# EAGLE board Photon_I2C_Shield_Panel (EAGLE 7.7.0)
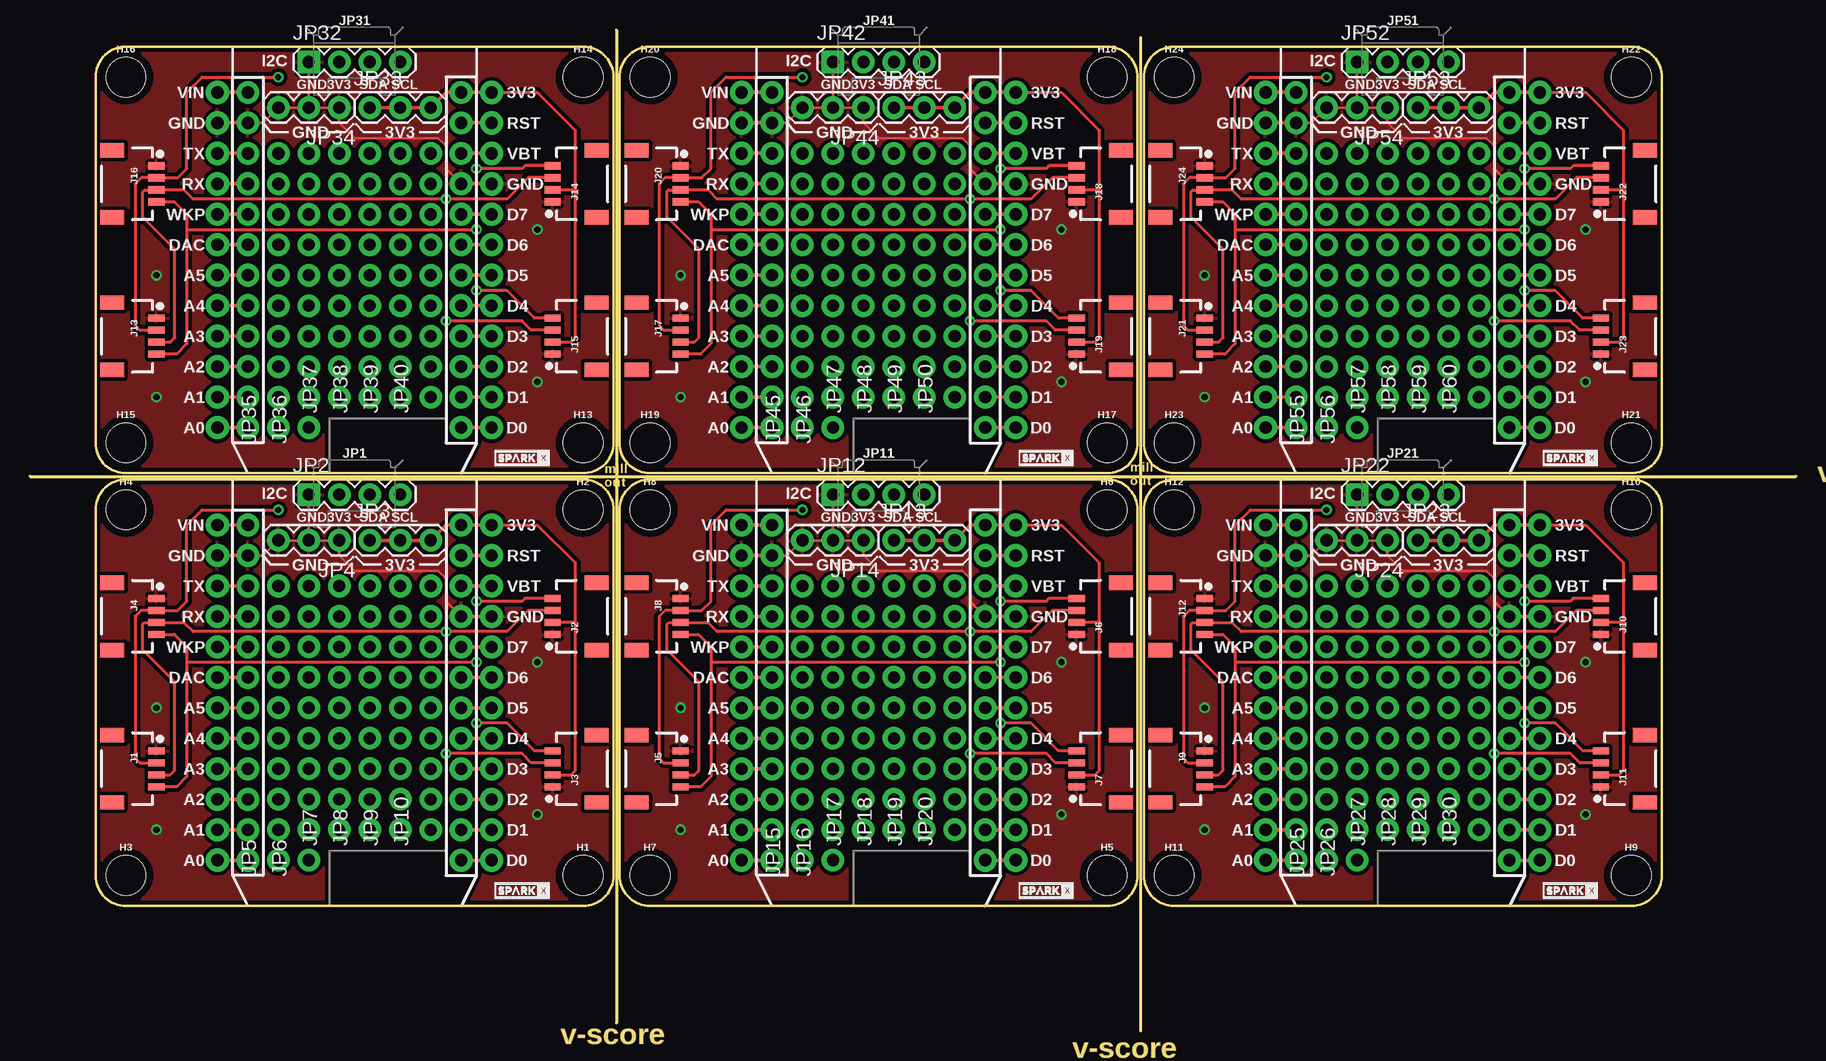
[diagram p0: board, top side]
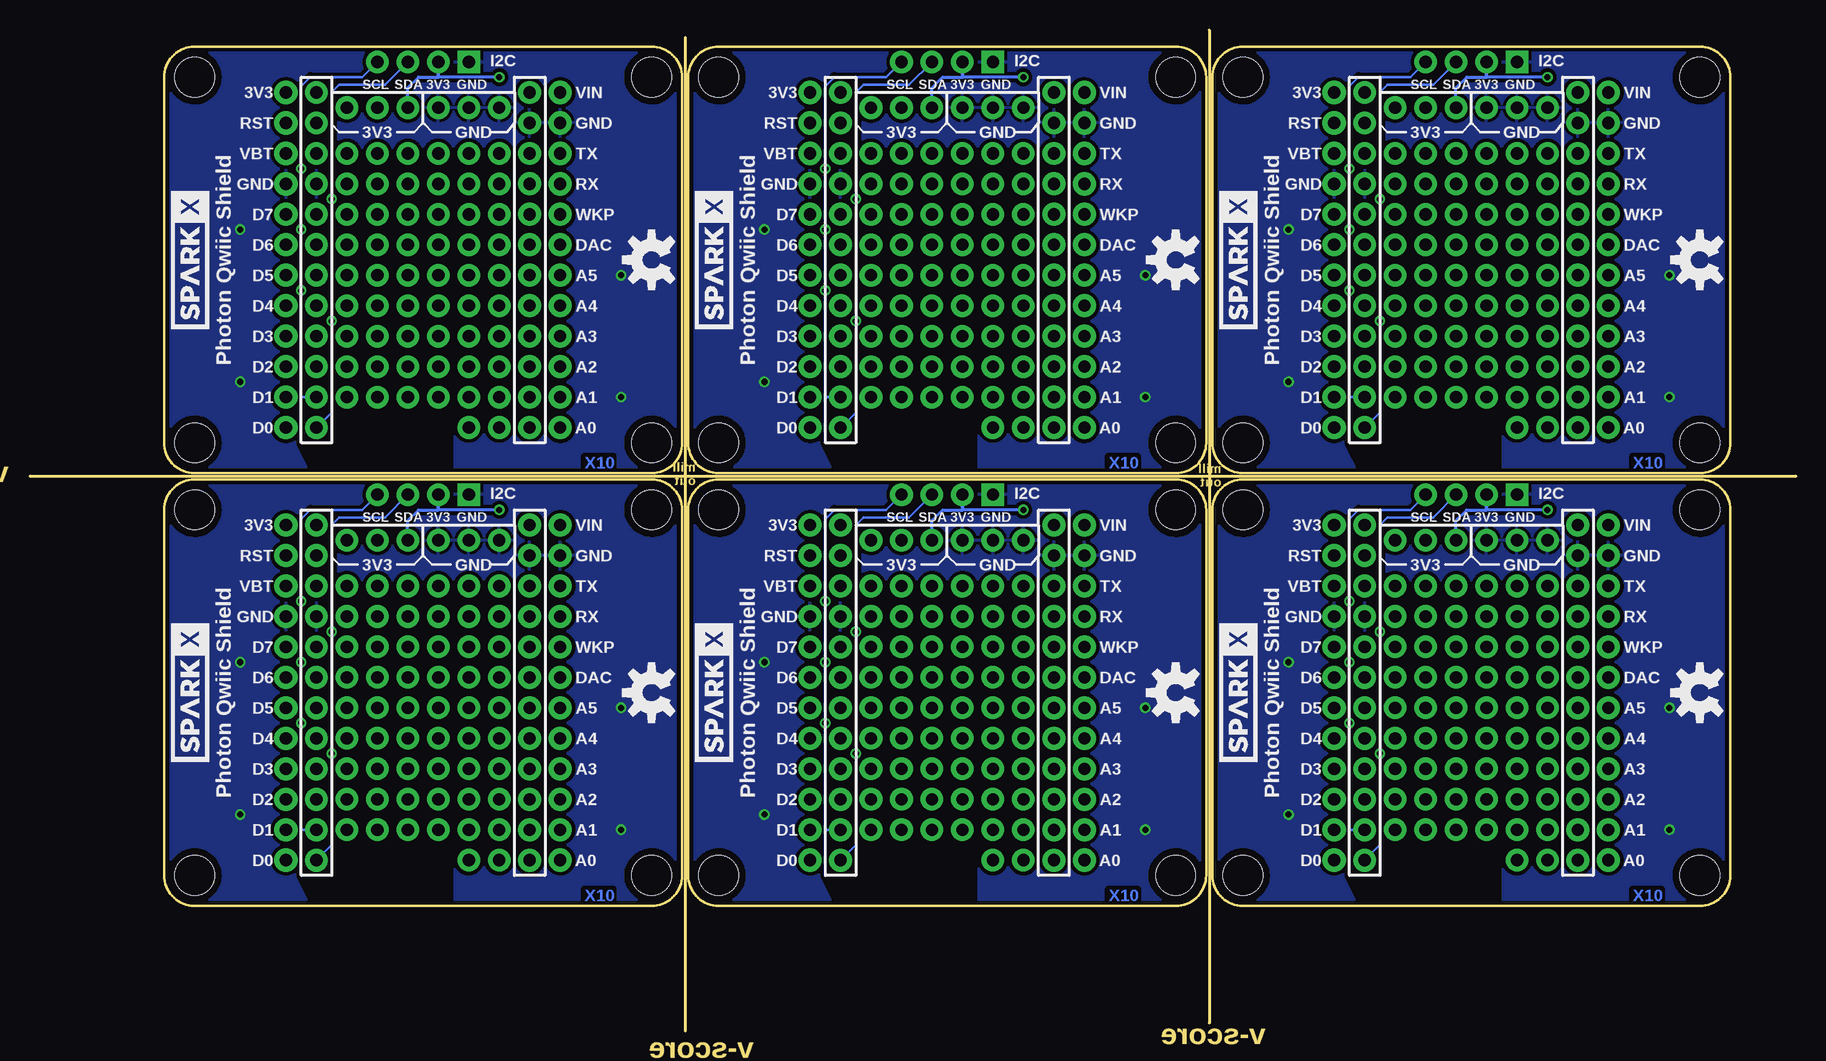
[diagram p1: board, bottom side, seen from below]

Size 147.19 x 83.44 mm. Coordinates in mm from the lower left corner, seen from the top.
Outline: 0,46.23 147.19,46.23
Outline: 48.89,83.44 48.89,0.63
Outline: 92.58,82.8 92.58,0
Outline: 5.46,12.95 5.46,43.43 arc-90 8,45.97 46.1,45.97 arc-90 48.64,43.43 48.64,12.95 arc-90 46.1,10.41 8,10.41 arc-90 5.46,12.95
Outline: 49.15,12.95 49.15,43.43 arc-90 51.69,45.97 89.79,45.97 arc-90 92.33,43.43 92.33,12.95 arc-90 89.79,10.41 51.69,10.41 arc-90 49.15,12.95
Outline: 92.84,12.95 92.84,43.43 arc-90 95.38,45.97 133.48,45.97 arc-90 136.02,43.43 136.02,12.95 arc-90 133.48,10.41 95.38,10.41 arc-90 92.84,12.95
Outline: 5.46,49.02 5.46,79.5 arc-90 8,82.04 46.1,82.04 arc-90 48.64,79.5 48.64,49.02 arc-90 46.1,46.48 8,46.48 arc-90 5.46,49.02
Outline: 49.15,49.02 49.15,79.5 arc-90 51.69,82.04 89.79,82.04 arc-90 92.33,79.5 92.33,49.02 arc-90 89.79,46.48 51.69,46.48 arc-90 49.15,49.02
Outline: 92.84,49.02 92.84,79.5 arc-90 95.38,82.04 133.48,82.04 arc-90 136.02,79.5 136.02,49.02 arc-90 133.48,46.48 95.38,46.48 arc-90 92.84,49.02
Copper layers (1*16): Top 0.035mm / dielectric 1.5mm / Bottom 0.035mm
Design rules "SparkFun-2-layer-TIGHT": minimum track width 7mil, minimum drill 15mil, track to track 7mil, track to pad 7mil, pad to pad 7mil, via to via 7mil, smd to smd 7mil, copper to edge 7mil, drill to drill 7mil, minimum pad ring 7mil, minimum via ring 7mil, stop-mask expansion 4mil, vias tented up to drill 25mil, thermal gap 10mil

## Footprints (pad centres in the part's own frame; a part is rotated, then mirrored left to right if it is on the bottom)
STAND-OFF = hole 3.302: 0,0
1X04_1MM_RA = smd 0.6 x 1.35: 1 -1.5,0; 2 -0.5,0; 3 0.5,0; 4 1.5,0 | smd 1.2 x 2: NC1 2.8,-3.675; NC2 -2.8,-3.675
PARTICLE_PHOTON_TEMPLATE_NO_STANDOFF = drill 1.016 pad 1.905: 1 -8.89,12.7; 2 -8.89,10.16; 3 -8.89,7.62; 4 -8.89,5.08; 5 -8.89,2.54; 6 -8.89,0; 7 -8.89,-2.54; 8 -8.89,-5.08; 9 -8.89,-7.62; 10 -8.89,-10.16; 11 -8.89,-12.7; 12 -8.89,-15.24; 13 8.89,-15.24; 14 8.89,-12.7; 15 8.89,-10.16; 16 8.89,-7.62; 17 8.89,-5.08; 18 8.89,-2.54; 19 8.89,0; 20 8.89,2.54; 21 8.89,5.08; 22 8.89,7.62; 23 8.89,10.16; 24 8.89,12.7 | drill 1.016 pad 1.93: 3V3 11.43,12.7; A0 -11.43,-15.24; A1 -11.43,-12.7; A2 -11.43,-10.16; A3 -11.43,-7.62; A4 -11.43,-5.08; A5 -11.43,-2.54; D0 11.43,-15.24; D1 11.43,-12.7; D2 11.43,-10.16; D3 11.43,-7.62; D4 11.43,-5.08; D5 11.43,-2.54; D6 11.43,0; D7 11.43,2.54; DAC -11.43,0; GND@0 -11.43,10.16; GND@2 11.43,5.08; RST 11.43,10.16; RX -11.43,5.08; TX -11.43,7.62; VBAT 11.43,7.62; VIN -11.43,12.7; WKP -11.43,2.54
1X04 = drill 1.016 pad 1.88 square: 1 0,0 | drill 1.016 pad 1.88: 2 2.54,0; 3 5.08,0; 4 7.62,0
1X03 = drill 1.016 pad 1.88: 1 0,0; 2 2.54,0; 3 5.08,0
1X10_NO_SILK = drill 1.016 pad 1.88: 1 0,0; 2 2.54,0; 3 5.08,0; 4 7.62,0; 5 10.16,0; 6 12.7,0; 7 15.24,0; 8 17.78,0; 9 20.32,0; 10 22.86,0
1X09_NO_SILK = drill 1.016 pad 1.88: 1 0,0; 2 2.54,0; 3 5.08,0; 4 7.62,0; 5 10.16,0; 6 12.7,0; 7 15.24,0; 8 17.78,0; 9 20.32,0

## Placement (x,y rotation side)
H1  STAND-OFF  [STAND-OFF]  46.1,12.95 0 top
H2  STAND-OFF  [STAND-OFF]  46.1,43.43 0 top
H3  STAND-OFF  [STAND-OFF]  8,12.95 0 top
H4  STAND-OFF  [STAND-OFF]  8,43.43 0 top
H5  STAND-OFF  [STAND-OFF]  89.79,12.95 0 top
H6  STAND-OFF  [STAND-OFF]  89.79,43.43 0 top
H7  STAND-OFF  [STAND-OFF]  51.69,12.95 0 top
H8  STAND-OFF  [STAND-OFF]  51.69,43.43 0 top
H9  STAND-OFF  [STAND-OFF]  133.48,12.95 0 top
H10  STAND-OFF  [STAND-OFF]  133.48,43.43 0 top
H11  STAND-OFF  [STAND-OFF]  95.38,12.95 0 top
H12  STAND-OFF  [STAND-OFF]  95.38,43.43 0 top
H13  STAND-OFF  [STAND-OFF]  46.1,49.02 0 top
H14  STAND-OFF  [STAND-OFF]  46.1,79.5 0 top
H15  STAND-OFF  [STAND-OFF]  8,49.02 0 top
H16  STAND-OFF  [STAND-OFF]  8,79.5 0 top
H17  STAND-OFF  [STAND-OFF]  89.79,49.02 0 top
H18  STAND-OFF  [STAND-OFF]  89.79,79.5 0 top
H19  STAND-OFF  [STAND-OFF]  51.69,49.02 0 top
H20  STAND-OFF  [STAND-OFF]  51.69,79.5 0 top
H21  STAND-OFF  [STAND-OFF]  133.48,49.02 0 top
H22  STAND-OFF  [STAND-OFF]  133.48,79.5 0 top
H23  STAND-OFF  [STAND-OFF]  95.38,49.02 0 top
H24  STAND-OFF  [STAND-OFF]  95.38,79.5 0 top
J1  [1X04_1MM_RA]  10.54,21.84 270 top
J2  [1X04_1MM_RA]  43.56,34.54 90 top
J3  [1X04_1MM_RA]  43.56,21.84 90 top
J4  [1X04_1MM_RA]  10.54,34.54 270 top
J5  [1X04_1MM_RA]  54.23,21.84 270 top
J6  [1X04_1MM_RA]  87.25,34.54 90 top
J7  [1X04_1MM_RA]  87.25,21.84 90 top
J8  [1X04_1MM_RA]  54.23,34.54 270 top
J9  [1X04_1MM_RA]  97.92,21.84 270 top
J10  [1X04_1MM_RA]  130.94,34.54 90 top
J11  [1X04_1MM_RA]  130.94,21.84 90 top
J12  [1X04_1MM_RA]  97.92,34.54 270 top
J13  [1X04_1MM_RA]  10.54,57.91 270 top
J14  [1X04_1MM_RA]  43.56,70.61 90 top
J15  [1X04_1MM_RA]  43.56,57.91 90 top
J16  [1X04_1MM_RA]  10.54,70.61 270 top
J17  [1X04_1MM_RA]  54.23,57.91 270 top
J18  [1X04_1MM_RA]  87.25,70.61 90 top
J19  [1X04_1MM_RA]  87.25,57.91 90 top
J20  [1X04_1MM_RA]  54.23,70.61 270 top
J21  [1X04_1MM_RA]  97.92,57.91 270 top
J22  [1X04_1MM_RA]  130.94,70.61 90 top
J23  [1X04_1MM_RA]  130.94,57.91 90 top
J24  [1X04_1MM_RA]  97.92,70.61 270 top
JP1  PARTICLE_PHOTONTEMPLATE_NO_STANDOFF  [PARTICLE_PHOTON_TEMPLATE_NO_STANDOFF]  27.05,29.46 0 top
JP2  [1X04]  23.24,44.7 0 top
JP3  [1X03]  28.32,40.89 0 top
JP4  [1X03]  25.78,40.89 180 top
JP5  [1X10_NO_SILK]  20.7,14.22 90 top
JP6  [1X10_NO_SILK]  23.24,14.22 90 top
JP7  [1X09_NO_SILK]  25.78,16.76 90 top
JP8  [1X09_NO_SILK]  28.32,16.76 90 top
JP9  [1X09_NO_SILK]  30.86,16.76 90 top
JP10  [1X09_NO_SILK]  33.4,16.76 90 top
JP11  PARTICLE_PHOTONTEMPLATE_NO_STANDOFF  [PARTICLE_PHOTON_TEMPLATE_NO_STANDOFF]  70.74,29.46 0 top
JP12  [1X04]  66.93,44.7 0 top
JP13  [1X03]  72.01,40.89 0 top
JP14  [1X03]  69.47,40.89 180 top
JP15  [1X10_NO_SILK]  64.39,14.22 90 top
JP16  [1X10_NO_SILK]  66.93,14.22 90 top
JP17  [1X09_NO_SILK]  69.47,16.76 90 top
JP18  [1X09_NO_SILK]  72.01,16.76 90 top
JP19  [1X09_NO_SILK]  74.55,16.76 90 top
JP20  [1X09_NO_SILK]  77.09,16.76 90 top
JP21  PARTICLE_PHOTONTEMPLATE_NO_STANDOFF  [PARTICLE_PHOTON_TEMPLATE_NO_STANDOFF]  114.43,29.46 0 top
JP22  [1X04]  110.62,44.7 0 top
JP23  [1X03]  115.7,40.89 0 top
JP24  [1X03]  113.16,40.89 180 top
JP25  [1X10_NO_SILK]  108.08,14.22 90 top
JP26  [1X10_NO_SILK]  110.62,14.22 90 top
JP27  [1X09_NO_SILK]  113.16,16.76 90 top
JP28  [1X09_NO_SILK]  115.7,16.76 90 top
JP29  [1X09_NO_SILK]  118.24,16.76 90 top
JP30  [1X09_NO_SILK]  120.78,16.76 90 top
JP31  PARTICLE_PHOTONTEMPLATE_NO_STANDOFF  [PARTICLE_PHOTON_TEMPLATE_NO_STANDOFF]  27.05,65.53 0 top
JP32  [1X04]  23.24,80.77 0 top
JP33  [1X03]  28.32,76.96 0 top
JP34  [1X03]  25.78,76.96 180 top
JP35  [1X10_NO_SILK]  20.7,50.29 90 top
JP36  [1X10_NO_SILK]  23.24,50.29 90 top
JP37  [1X09_NO_SILK]  25.78,52.83 90 top
JP38  [1X09_NO_SILK]  28.32,52.83 90 top
JP39  [1X09_NO_SILK]  30.86,52.83 90 top
JP40  [1X09_NO_SILK]  33.4,52.83 90 top
JP41  PARTICLE_PHOTONTEMPLATE_NO_STANDOFF  [PARTICLE_PHOTON_TEMPLATE_NO_STANDOFF]  70.74,65.53 0 top
JP42  [1X04]  66.93,80.77 0 top
JP43  [1X03]  72.01,76.96 0 top
JP44  [1X03]  69.47,76.96 180 top
JP45  [1X10_NO_SILK]  64.39,50.29 90 top
JP46  [1X10_NO_SILK]  66.93,50.29 90 top
JP47  [1X09_NO_SILK]  69.47,52.83 90 top
JP48  [1X09_NO_SILK]  72.01,52.83 90 top
JP49  [1X09_NO_SILK]  74.55,52.83 90 top
JP50  [1X09_NO_SILK]  77.09,52.83 90 top
JP51  PARTICLE_PHOTONTEMPLATE_NO_STANDOFF  [PARTICLE_PHOTON_TEMPLATE_NO_STANDOFF]  114.43,65.53 0 top
JP52  [1X04]  110.62,80.77 0 top
JP53  [1X03]  115.7,76.96 0 top
JP54  [1X03]  113.16,76.96 180 top
JP55  [1X10_NO_SILK]  108.08,50.29 90 top
JP56  [1X10_NO_SILK]  110.62,50.29 90 top
JP57  [1X09_NO_SILK]  113.16,52.83 90 top
JP58  [1X09_NO_SILK]  115.7,52.83 90 top
JP59  [1X09_NO_SILK]  118.24,52.83 90 top
JP60  [1X09_NO_SILK]  120.78,52.83 90 top
LOGO1  OSHW-LOGOM  [OSHW-LOGO-M]  8,28.19 90 bottom
LOGO2  OSHW-LOGOM  [OSHW-LOGO-M]  51.69,28.19 90 bottom
LOGO3  OSHW-LOGOM  [OSHW-LOGO-M]  95.38,28.19 90 bottom
LOGO4  OSHW-LOGOM  [OSHW-LOGO-M]  8,64.26 90 bottom
LOGO5  OSHW-LOGOM  [OSHW-LOGO-M]  51.69,64.26 90 bottom
LOGO6  OSHW-LOGOM  [OSHW-LOGO-M]  95.38,64.26 90 bottom
U$1  [SPARKX-TINY]  41.02,11.68 0 top
U$2  [SPARKX-TINY]  84.71,11.68 0 top
U$3  SPARKX-LOGO5  [SPARKX-LARGE]  90.17,28.19 90 bottom
U$4  SPARKX-LOGO5  [SPARKX-LARGE]  46.48,28.19 90 bottom
U$5  [SPARKX-TINY]  128.4,11.68 0 top
U$6  SPARKX-LOGO5  [SPARKX-LARGE]  133.86,28.19 90 bottom
U$7  [SPARKX-TINY]  41.02,47.75 0 top
U$8  SPARKX-LOGO5  [SPARKX-LARGE]  46.48,64.26 90 bottom
U$9  [SPARKX-TINY]  84.71,47.75 0 top
U$10  SPARKX-LOGO5  [SPARKX-LARGE]  90.17,64.26 90 bottom
U$11  [SPARKX-TINY]  128.4,47.75 0 top
U$12  SPARKX-LOGO5  [SPARKX-LARGE]  133.86,64.26 90 bottom

## Library data of the parts
H1-H24 = SparkFun-Hardware
J1-J24 U$1-U$12 = SparkX
JP1 JP11 JP21 JP31 JP41 JP51 = SparkFun-Boards
JP2-JP4 JP7-JP10 JP12-JP14 JP17-JP20 JP22-JP24 JP27-JP30 JP32-JP34 JP37-JP40 JP42-JP44 JP47-JP50 JP52-JP54 JP57-JP60 = SparkFun-Connectors
JP5 JP6 JP15 JP16 JP25 JP26 JP35 JP36 JP45 JP46 JP55 JP56 = SparkFun-Connectors; PROD_ID: CONN-11563
LOGO1-LOGO6 = SparkFun-Aesthetics

## Nets
A0: JP1.12 JP1.A0
A1: JP1.11 JP1.A1
A2: JP1.10 JP1.A2
A3: JP1.9 JP1.A3
A4: JP1.8 JP1.A4
A5: JP1.7 JP1.A5
A6: JP11.7 JP11.A5
A7: JP11.8 JP11.A4
A8: JP11.9 JP11.A3
A9: JP11.10 JP11.A2
A10: JP11.11 JP11.A1
A11: JP11.12 JP11.A0
A12: JP21.7 JP21.A5
A13: JP21.8 JP21.A4
A14: JP21.9 JP21.A3
A15: JP21.10 JP21.A2
A16: JP21.11 JP21.A1
A17: JP21.12 JP21.A0
A18: JP31.7 JP31.A5
A19: JP31.8 JP31.A4
A20: JP31.9 JP31.A3
A21: JP31.10 JP31.A2
A22: JP31.11 JP31.A1
A23: JP31.12 JP31.A0
A24: JP41.7 JP41.A5
A25: JP41.8 JP41.A4
A26: JP41.9 JP41.A3
A27: JP41.10 JP41.A2
A28: JP41.11 JP41.A1
A29: JP41.12 JP41.A0
A30: JP51.7 JP51.A5
A31: JP51.8 JP51.A4
A32: JP51.9 JP51.A3
A33: JP51.10 JP51.A2
A34: JP51.11 JP51.A1
A35: JP51.12 JP51.A0
D1: JP11.20 JP11.D7
D2: JP1.15 JP1.D2
D3: JP1.16 JP1.D3
D4: JP1.17 JP1.D4
D5: JP1.18 JP1.D5
D6: JP1.19 JP1.D6
D7: JP1.20 JP1.D7
D8: JP11.19 JP11.D6
D9: JP11.18 JP11.D5
D10: JP11.17 JP11.D4
D11: JP11.16 JP11.D3
D12: JP11.15 JP11.D2
D13: JP21.20 JP21.D7
D14: JP21.19 JP21.D6
D15: JP21.18 JP21.D5
D16: JP21.17 JP21.D4
D17: JP21.16 JP21.D3
D18: JP21.15 JP21.D2
D19: JP31.20 JP31.D7
D20: JP31.19 JP31.D6
D21: JP31.18 JP31.D5
D22: JP31.17 JP31.D4
D23: JP31.16 JP31.D3
D24: JP31.15 JP31.D2
D25: JP41.20 JP41.D7
D26: JP41.19 JP41.D6
D27: JP41.18 JP41.D5
D28: JP41.17 JP41.D4
D29: JP41.16 JP41.D3
D30: JP41.15 JP41.D2
D31: JP51.20 JP51.D7
D32: JP51.19 JP51.D6
D33: JP51.18 JP51.D5
D34: JP51.17 JP51.D4
D35: JP51.16 JP51.D3
D36: JP51.15 JP51.D2
DAC: JP1.6 JP1.DAC
DAC1: JP11.6 JP11.DAC
DAC2: JP21.6 JP21.DAC
DAC3: JP31.6 JP31.DAC
DAC4: JP41.6 JP41.DAC
DAC5: JP51.6 JP51.DAC
GND: J1.1 J2.1 J3.1 J4.1 JP1.2 JP1.21 JP1.GND@0 JP1.GND@2 JP2.1 JP4.1 JP4.2 JP4.3
GND1: J5.1 J6.1 J7.1 J8.1 JP11.2 JP11.21 JP11.GND@0 JP11.GND@2 JP12.1 JP14.1 JP14.2 JP14.3
GND2: J9.1 J10.1 J11.1 J12.1 JP21.2 JP21.21 JP21.GND@0 JP21.GND@2 JP22.1 JP24.1 JP24.2 JP24.3
GND3: J13.1 J14.1 J15.1 J16.1 JP31.2 JP31.21 JP31.GND@0 JP31.GND@2 JP32.1 JP34.1 JP34.2 JP34.3
GND4: J17.1 J18.1 J19.1 J20.1 JP41.2 JP41.21 JP41.GND@0 JP41.GND@2 JP42.1 JP44.1 JP44.2 JP44.3
GND5: J21.1 J22.1 J23.1 J24.1 JP51.2 JP51.21 JP51.GND@0 JP51.GND@2 JP52.1 JP54.1 JP54.2 JP54.3
RST: JP1.23 JP1.RST
RST1: JP11.23 JP11.RST
RST2: JP21.23 JP21.RST
RST3: JP31.23 JP31.RST
RST4: JP41.23 JP41.RST
RST5: JP51.23 JP51.RST
RX: JP1.4 JP1.RX
RX1: JP11.4 JP11.RX
RX2: JP21.4 JP21.RX
RX3: JP31.4 JP31.RX
RX4: JP41.4 JP41.RX
RX5: JP51.4 JP51.RX
SCL: J1.4 J2.4 J3.4 J4.4 JP1.14 JP1.D1 JP2.4
SCL1: J5.4 J6.4 J7.4 J8.4 JP11.14 JP11.D1 JP12.4
SCL2: J9.4 J10.4 J11.4 J12.4 JP21.14 JP21.D1 JP22.4
SCL3: J13.4 J14.4 J15.4 J16.4 JP31.14 JP31.D1 JP32.4
SCL4: J17.4 J18.4 J19.4 J20.4 JP41.14 JP41.D1 JP42.4
SCL5: J21.4 J22.4 J23.4 J24.4 JP51.14 JP51.D1 JP52.4
SDA: J1.3 J2.3 J3.3 J4.3 JP1.13 JP1.D0 JP2.3
SDA1: J5.3 J6.3 J7.3 J8.3 JP11.13 JP11.D0 JP12.3
SDA2: J9.3 J10.3 J11.3 J12.3 JP21.13 JP21.D0 JP22.3
SDA3: J13.3 J14.3 J15.3 J16.3 JP31.13 JP31.D0 JP32.3
SDA4: J17.3 J18.3 J19.3 J20.3 JP41.13 JP41.D0 JP42.3
SDA5: J21.3 J22.3 J23.3 J24.3 JP51.13 JP51.D0 JP52.3
TX: JP1.3 JP1.TX
TX1: JP11.3 JP11.TX
TX2: JP21.3 JP21.TX
TX3: JP31.3 JP31.TX
TX4: JP41.3 JP41.TX
TX5: JP51.3 JP51.TX
VBAT: JP1.22 JP1.VBAT
VBAT1: JP11.22 JP11.VBAT
VBAT2: JP21.22 JP21.VBAT
VBAT3: JP31.22 JP31.VBAT
VBAT4: JP41.22 JP41.VBAT
VBAT5: JP51.22 JP51.VBAT
VCC: J1.2 J2.2 J3.2 J4.2 JP1.3V3 JP1.24 JP2.2 JP3.1 JP3.2 JP3.3
VCC1: J5.2 J6.2 J7.2 J8.2 JP11.3V3 JP11.24 JP12.2 JP13.1 JP13.2 JP13.3
VCC2: J9.2 J10.2 J11.2 J12.2 JP21.3V3 JP21.24 JP22.2 JP23.1 JP23.2 JP23.3
VCC3: J13.2 J14.2 J15.2 J16.2 JP31.3V3 JP31.24 JP32.2 JP33.1 JP33.2 JP33.3
VCC4: J17.2 J18.2 J19.2 J20.2 JP41.3V3 JP41.24 JP42.2 JP43.1 JP43.2 JP43.3
VCC5: J21.2 J22.2 J23.2 J24.2 JP51.3V3 JP51.24 JP52.2 JP53.1 JP53.2 JP53.3
VIN: JP1.1 JP1.VIN
VIN1: JP11.1 JP11.VIN
VIN2: JP21.1 JP21.VIN
VIN3: JP31.1 JP31.VIN
VIN4: JP41.1 JP41.VIN
VIN5: JP51.1 JP51.VIN
WKP: JP1.5 JP1.WKP
WKP1: JP11.5 JP11.WKP
WKP2: JP21.5 JP21.WKP
WKP3: JP31.5 JP31.WKP
WKP4: JP41.5 JP41.WKP
WKP5: JP51.5 JP51.WKP

## Tracks (layer width: path | path; a pad name or v marks a point on that pad's centre or on a via)
GND  (via drill 0.51)
  Top 0.203: JP1.2 19.43,39.62 JP4.3 JP4.2 | JP4.2 JP4.1 25.78,39.62 27.05,38.35 34.04,38.35 34.67,37.72 34.67,35.81 | JP4.2 JP2.1
  Top 0.254: 34.67,35.81 JP1.21
  other vias: 42.29,30.73 42.29,18.03 10.54,26.92 10.54,16.76
  pour Top (isolate 0.305): 5.46,45.97 5.46,10.41 48.64,10.41 48.64,45.97
  pour Bottom (isolate 0.305): 5.46,45.97 5.46,10.41 48.64,10.41 48.64,45.97
GND1  (via drill 0.51)
  Top 0.203: JP11.2 63.12,39.62 JP14.3 JP14.2 | JP14.2 JP14.1 69.47,39.62 70.74,38.35 77.72,38.35 78.36,37.72 78.36,35.81 | JP14.2 JP12.1
  Top 0.254: 78.36,35.81 JP11.21
  other vias: 85.98,30.73 85.98,18.03 54.23,26.92 54.23,16.76
  pour Top (isolate 0.305): 49.15,45.97 49.15,10.41 92.33,10.41 92.33,45.97
  pour Bottom (isolate 0.305): 49.15,45.97 49.15,10.41 92.33,10.41 92.33,45.97
GND2  (via drill 0.51)
  Top 0.203: JP21.2 106.81,39.62 JP24.3 JP24.2 | JP24.2 JP24.1 113.16,39.62 114.43,38.35 121.41,38.35 122.05,37.72 122.05,35.81 | JP24.2 JP22.1
  Top 0.254: 122.05,35.81 JP21.21
  other vias: 129.67,30.73 129.67,18.03 97.92,26.92 97.92,16.76
  pour Top (isolate 0.305): 92.84,45.97 92.84,10.41 136.02,10.41 136.02,45.97
  pour Bottom (isolate 0.305): 92.84,45.97 92.84,10.41 136.02,10.41 136.02,45.97
GND3  (via drill 0.51)
  Top 0.203: JP31.2 19.43,75.69 JP34.3 JP34.2 | JP34.2 JP34.1 25.78,75.69 27.05,74.42 34.04,74.42 34.67,73.79 34.67,71.88 | JP34.2 JP32.1
  Top 0.254: 34.67,71.88 JP31.21
  other vias: 42.29,66.8 42.29,54.1 10.54,62.99 10.54,52.83
  pour Top (isolate 0.305): 5.46,82.04 5.46,46.48 48.64,46.48 48.64,82.04
  pour Bottom (isolate 0.305): 5.46,82.04 5.46,46.48 48.64,46.48 48.64,82.04
GND4  (via drill 0.51)
  Top 0.203: JP41.2 63.12,75.69 JP44.3 JP44.2 | JP44.2 JP44.1 69.47,75.69 70.74,74.42 77.72,74.42 78.36,73.79 78.36,71.88 | JP44.2 JP42.1
  Top 0.254: 78.36,71.88 JP41.21
  other vias: 85.98,66.8 85.98,54.1 54.23,62.99 54.23,52.83
  pour Top (isolate 0.305): 49.15,82.04 49.15,46.48 92.33,46.48 92.33,82.04
  pour Bottom (isolate 0.305): 49.15,82.04 49.15,46.48 92.33,46.48 92.33,82.04
GND5  (via drill 0.51)
  Top 0.203: JP51.2 106.81,75.69 JP54.3 JP54.2 | JP54.2 JP54.1 113.16,75.69 114.43,74.42 121.41,74.42 122.05,73.79 122.05,71.88 | JP54.2 JP52.1
  Top 0.254: 122.05,71.88 JP51.21
  other vias: 129.67,66.8 129.67,54.1 97.92,62.99 97.92,52.83
  pour Top (isolate 0.305): 92.84,82.04 92.84,46.48 136.02,46.48 136.02,82.04
  pour Bottom (isolate 0.305): 92.84,82.04 92.84,46.48 136.02,46.48 136.02,82.04
SCL  (via drill 0.51)
  Top 0.254: J3.4 42.06,23.34 39.75,25.65 v37.21,25.65 | J2.4 41.25,36.04 41.02,35.81 v37.21,35.81 | J4.4 12.04,33.04 13.08,32 13.08,30.73 | 13.08,30.73 13.08,21.21 12.22,20.34 J1.4 | 13.08,30.73 v37.21,30.73
  Bottom 0.203: v37.21,30.73 v37.21,25.65 37.21,16.76 JP1.14 | v37.21,35.81 37.21,42.67 36.45,43.43 32.13,43.43 JP2.4
  Bottom 0.254: v37.21,30.73 v37.21,35.81
SCL1  (via drill 0.51)
  Top 0.254: J7.4 85.75,23.34 83.44,25.65 v80.9,25.65 | J6.4 84.94,36.04 84.71,35.81 v80.9,35.81 | J8.4 55.73,33.04 56.77,32 56.77,30.73 | 56.77,30.73 56.77,21.21 55.9,20.34 J5.4 | 56.77,30.73 v80.9,30.73
  Bottom 0.203: v80.9,30.73 v80.9,25.65 80.9,16.76 JP11.14 | v80.9,35.81 80.9,42.67 80.14,43.43 75.82,43.43 JP12.4
  Bottom 0.254: v80.9,30.73 v80.9,35.81
SCL2  (via drill 0.51)
  Top 0.254: J11.4 129.44,23.34 127.13,25.65 v124.59,25.65 | J10.4 128.63,36.04 128.4,35.81 v124.59,35.81 | J12.4 99.42,33.04 100.46,32 100.46,30.73 | 100.46,30.73 100.46,21.21 99.59,20.34 J9.4 | 100.46,30.73 v124.59,30.73
  Bottom 0.203: v124.59,30.73 v124.59,25.65 124.59,16.76 JP21.14 | v124.59,35.81 124.59,42.67 123.83,43.43 119.51,43.43 JP22.4
  Bottom 0.254: v124.59,30.73 v124.59,35.81
SCL3  (via drill 0.51)
  Top 0.254: J15.4 42.06,59.41 39.75,61.72 v37.21,61.72 | J14.4 41.25,72.11 41.02,71.88 v37.21,71.88 | J16.4 12.04,69.11 13.08,68.07 13.08,66.8 | 13.08,66.8 13.08,57.28 12.22,56.41 J13.4 | 13.08,66.8 v37.21,66.8
  Bottom 0.203: v37.21,66.8 v37.21,61.72 37.21,52.83 JP31.14 | v37.21,71.88 37.21,78.74 36.45,79.5 32.13,79.5 JP32.4
  Bottom 0.254: v37.21,66.8 v37.21,71.88
SCL4  (via drill 0.51)
  Top 0.254: J19.4 85.75,59.41 83.44,61.72 v80.9,61.72 | J18.4 84.94,72.11 84.71,71.88 v80.9,71.88 | J20.4 55.73,69.11 56.77,68.07 56.77,66.8 | 56.77,66.8 56.77,57.28 55.9,56.41 J17.4 | 56.77,66.8 v80.9,66.8
  Bottom 0.203: v80.9,66.8 v80.9,61.72 80.9,52.83 JP41.14 | v80.9,71.88 80.9,78.74 80.14,79.5 75.82,79.5 JP42.4
  Bottom 0.254: v80.9,66.8 v80.9,71.88
SCL5  (via drill 0.51)
  Top 0.254: J23.4 129.44,59.41 127.13,61.72 v124.59,61.72 | J22.4 128.63,72.11 128.4,71.88 v124.59,71.88 | J24.4 99.42,69.11 100.46,68.07 100.46,66.8 | 100.46,66.8 100.46,57.28 99.59,56.41 J21.4 | 100.46,66.8 v124.59,66.8
  Bottom 0.203: v124.59,66.8 v124.59,61.72 124.59,52.83 JP51.14 | v124.59,71.88 124.59,78.74 123.83,79.5 119.51,79.5 JP52.4
  Bottom 0.254: v124.59,66.8 v124.59,71.88
SDA  (via drill 0.51)
  Top 0.254: J3.3 41.79,22.34 41.02,23.11 v34.67,23.11 | J2.3 41.52,35.04 39.75,33.27 v34.67,33.27 13.6,33.27 12.83,34.04 J4.3 9.53,34.04 9.4,33.91 9.4,31.75 12.07,29.08 12.07,21.72 11.69,21.34 J1.3
  Bottom 0.203: JP1.13 34.67,15.49 v34.67,23.11 v34.67,33.27 34.67,42.16 34.04,42.8 30.23,42.8 JP2.3
SDA1  (via drill 0.51)
  Top 0.254: J7.3 85.48,22.34 84.71,23.11 v78.36,23.11 | J6.3 85.21,35.04 83.44,33.27 v78.36,33.27 57.29,33.27 56.52,34.04 J8.3 53.21,34.04 53.09,33.91 53.09,31.75 55.75,29.08 55.75,21.72 55.38,21.34 J5.3
  Bottom 0.203: JP11.13 78.36,15.49 v78.36,23.11 v78.36,33.27 78.36,42.16 77.72,42.8 73.91,42.8 JP12.3
SDA2  (via drill 0.51)
  Top 0.254: J11.3 129.17,22.34 128.4,23.11 v122.05,23.11 | J10.3 128.9,35.04 127.13,33.27 v122.05,33.27 100.98,33.27 100.21,34.04 J12.3 97.91,34.04 96.9,34.04 96.77,33.91 96.77,31.75 99.44,29.08 99.44,21.72 99.07,21.34 J9.3
  Bottom 0.203: JP21.13 122.05,15.49 v122.05,23.11 v122.05,33.27 122.05,42.16 121.41,42.8 117.6,42.8 JP22.3
SDA3  (via drill 0.51)
  Top 0.254: J15.3 41.79,58.41 41.02,59.18 v34.67,59.18 | J14.3 41.52,71.11 39.75,69.34 v34.67,69.34 13.6,69.34 12.83,70.11 J16.3 9.53,70.1 9.4,69.98 9.4,67.82 12.07,65.15 12.07,57.79 11.69,57.41 J13.3
  Bottom 0.203: JP31.13 34.67,51.56 v34.67,59.18 v34.67,69.34 34.67,78.23 34.04,78.87 30.23,78.87 JP32.3
SDA4  (via drill 0.51)
  Top 0.254: J19.3 85.48,58.41 84.71,59.18 v78.36,59.18 | J18.3 85.21,71.11 83.44,69.34 v78.36,69.34 57.29,69.34 56.52,70.11 J20.3 53.21,70.1 53.09,69.98 53.09,67.82 55.75,65.15 55.75,57.79 55.38,57.41 J17.3
  Bottom 0.203: JP41.13 78.36,51.56 v78.36,59.18 v78.36,69.34 78.36,78.23 77.72,78.87 73.91,78.87 JP42.3
SDA5  (via drill 0.51)
  Top 0.254: J23.3 129.17,58.41 128.4,59.18 v122.05,59.18 | J22.3 128.9,71.11 127.13,69.34 v122.05,69.34 100.98,69.34 100.21,70.11 J24.3 97.91,70.1 96.9,70.1 96.77,69.98 96.77,67.82 99.44,65.15 99.44,57.79 99.07,57.41 J21.3
  Bottom 0.203: JP51.13 122.05,51.56 v122.05,59.18 v122.05,69.34 122.05,78.23 121.41,78.87 117.6,78.87 JP52.3
VCC  (via drill 0.51)
  Top 0.254: J3.2 45.09,21.34 45.47,21.72 45.47,34.04 | 45.47,34.04 45.47,38.99 42.29,42.16 JP1.3V3 | 45.47,34.04 J2.2 | J1.2 arc90 J1.2 9.14,22.35 8.76,22.73 8.76,34.54 9.26,35.04 J4.2 12.31,35.04 13.08,35.81 13.08,42.16 14.35,43.43 v20.7,43.43
  Top 0.305: JP1.24 34.67,42.16 JP3.3 JP3.2 JP3.1
  Bottom 0.254: v20.7,43.43 25.78,43.43 27.44,43.43 28.32,42.55 JP3.1
  Bottom 0.305: 25.78,43.43 JP2.2
VCC1  (via drill 0.51)
  Top 0.254: J7.2 88.78,21.34 89.15,21.72 89.15,34.04 | 89.15,34.04 89.15,38.99 85.98,42.16 JP11.3V3 | 89.15,34.04 J6.2 | J5.2 arc90 J5.2 52.83,22.35 52.45,22.73 52.45,34.54 52.95,35.04 J8.2 56,35.04 56.77,35.81 56.77,42.16 58.04,43.43 v64.39,43.43
  Top 0.305: JP11.24 78.36,42.16 JP13.3 JP13.2 JP13.1
  Bottom 0.254: v64.39,43.43 69.47,43.43 71.13,43.43 72.01,42.55 JP13.1
  Bottom 0.305: 69.47,43.43 JP12.2
VCC2  (via drill 0.51)
  Top 0.254: J11.2 132.47,21.34 132.84,21.72 132.84,34.04 | 132.84,34.04 132.84,38.99 129.67,42.16 JP21.3V3 | 132.84,34.04 J10.2 | J9.2 arc90 97.91,22.35 96.52,22.35 96.14,22.73 96.14,34.54 96.64,35.04 J12.2 99.69,35.04 100.46,35.81 100.46,42.16 101.73,43.43 v108.08,43.43
  Top 0.305: JP21.24 122.05,42.16 JP23.3 JP23.2 JP23.1
  Bottom 0.254: v108.08,43.43 113.16,43.43 114.82,43.43 115.7,42.55 JP23.1
  Bottom 0.305: 113.16,43.43 JP22.2
VCC3  (via drill 0.51)
  Top 0.254: J15.2 45.09,57.41 45.47,57.79 45.47,70.1 | 45.47,70.1 45.47,75.06 42.29,78.23 JP31.3V3 | 45.47,70.1 J14.2 | J13.2 arc90 J13.2 9.14,58.42 8.76,58.8 8.76,70.61 9.26,71.11 J16.2 12.31,71.11 13.08,71.88 13.08,78.23 14.35,79.5 v20.7,79.5
  Top 0.305: JP31.24 34.67,78.23 JP33.3 JP33.2 JP33.1
  Bottom 0.254: v20.7,79.5 25.78,79.5 27.44,79.5 28.32,78.62 JP33.1
  Bottom 0.305: 25.78,79.5 JP32.2
VCC4  (via drill 0.51)
  Top 0.254: J19.2 88.78,57.41 89.15,57.79 89.15,70.1 | 89.15,70.1 89.15,75.06 85.98,78.23 JP41.3V3 | 89.15,70.1 J18.2 | J17.2 arc90 J17.2 52.83,58.42 52.45,58.8 52.45,70.61 52.95,71.11 J20.2 56,71.11 56.77,71.88 56.77,78.23 58.04,79.5 v64.39,79.5
  Top 0.305: JP41.24 78.36,78.23 JP43.3 JP43.2 JP43.1
  Bottom 0.254: v64.39,79.5 69.47,79.5 71.13,79.5 72.01,78.62 JP43.1
  Bottom 0.305: 69.47,79.5 JP42.2
VCC5  (via drill 0.51)
  Top 0.254: J23.2 132.47,57.41 132.84,57.79 132.84,70.1 | 132.84,70.1 132.84,75.06 129.67,78.23 JP51.3V3 | 132.84,70.1 J22.2 | J21.2 arc90 97.91,58.42 96.52,58.42 96.14,58.8 96.14,70.61 96.64,71.11 J24.2 99.69,71.11 100.46,71.88 100.46,78.23 101.73,79.5 v108.08,79.5
  Top 0.305: JP51.24 122.05,78.23 JP53.3 JP53.2 JP53.1
  Bottom 0.254: v108.08,79.5 113.16,79.5 114.82,79.5 115.7,78.62 JP53.1
  Bottom 0.305: 113.16,79.5 JP52.2

## Text on the board
Bottom: X10 | X10 | X10 | X10 | X10 | X10
Dimension: mill / out | mill / out | v-score | v-score | v-score
tPlace: I2C | I2C | I2C | GND | 3V3 | SDA | SCL | GND | 3V3 | SDA | SCL | GND | 3V3 | SDA | SCL | GND | 3V3 | GND | 3V3 | GND | 3V3 | I2C | I2C | I2C | GND | 3V3 | SDA | SCL | GND | 3V3 | SDA | SCL | GND | 3V3 | SDA | SCL | GND | 3V3 | GND | 3V3 | GND | 3V3
bPlace: I2C | I2C | I2C | GND | 3V3 | SDA | SCL | GND | 3V3 | SDA | SCL | GND | 3V3 | SDA | SCL | GND | 3V3 | GND | 3V3 | GND | 3V3 | Photon Qwiic Shield | Photon Qwiic Shield | Photon Qwiic Shield | I2C | I2C | I2C | GND | 3V3 | SDA | SCL | GND | 3V3 | SDA | SCL | GND | 3V3 | SDA | SCL | GND | 3V3 | GND | 3V3 | GND | 3V3 | Photon Qwiic Shield | Photon Qwiic Shield | Photon Qwiic Shield
Measures: Units in Inches